# Altium PCB bootleg-alps.PcbDoc (part 1 of 3)
Units mm, origin at the board's own origin, x right, y up, seen from the top; angles counter-clockwise.
Board outline 284.8 x 94.3 mm, 2 copper layers (Component Side, Bottom Layer), stack 1.571 mm thick; 188 components, 146 nets, 677 pads, 266 vias.
Unrouted connection lines stored in the file: 68.
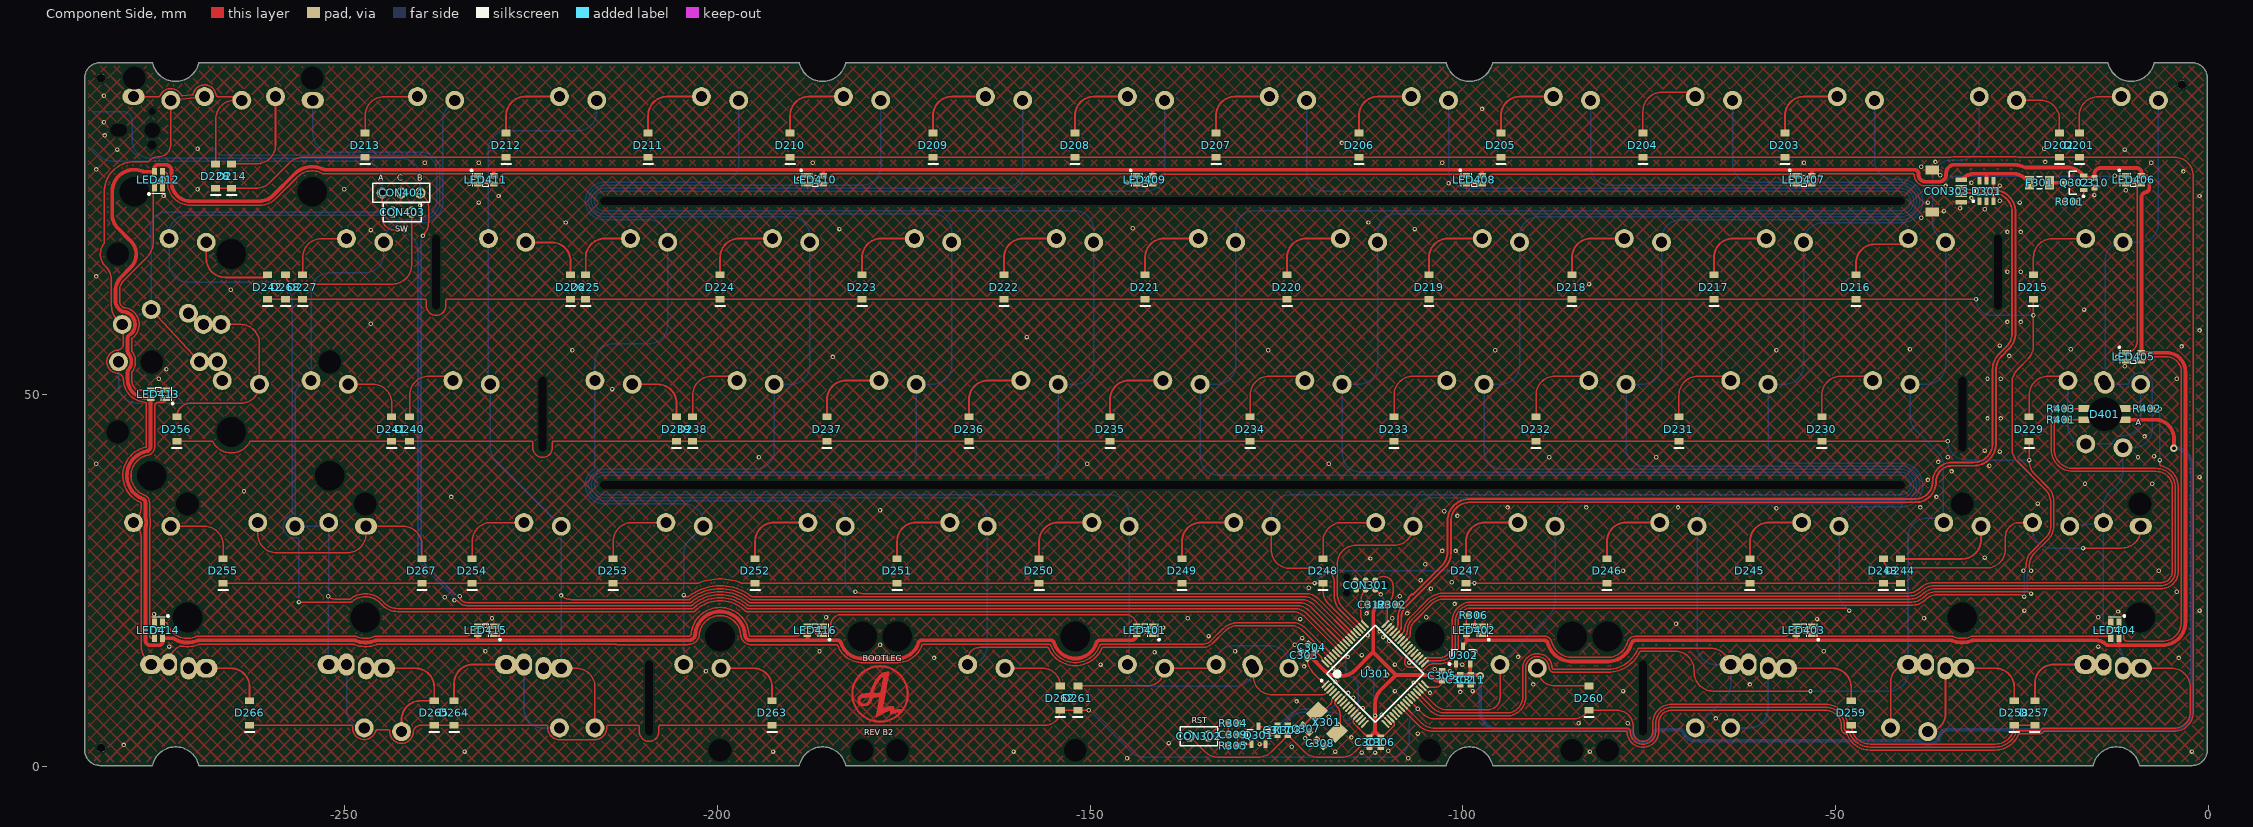
[diagram p0: Component Side view]
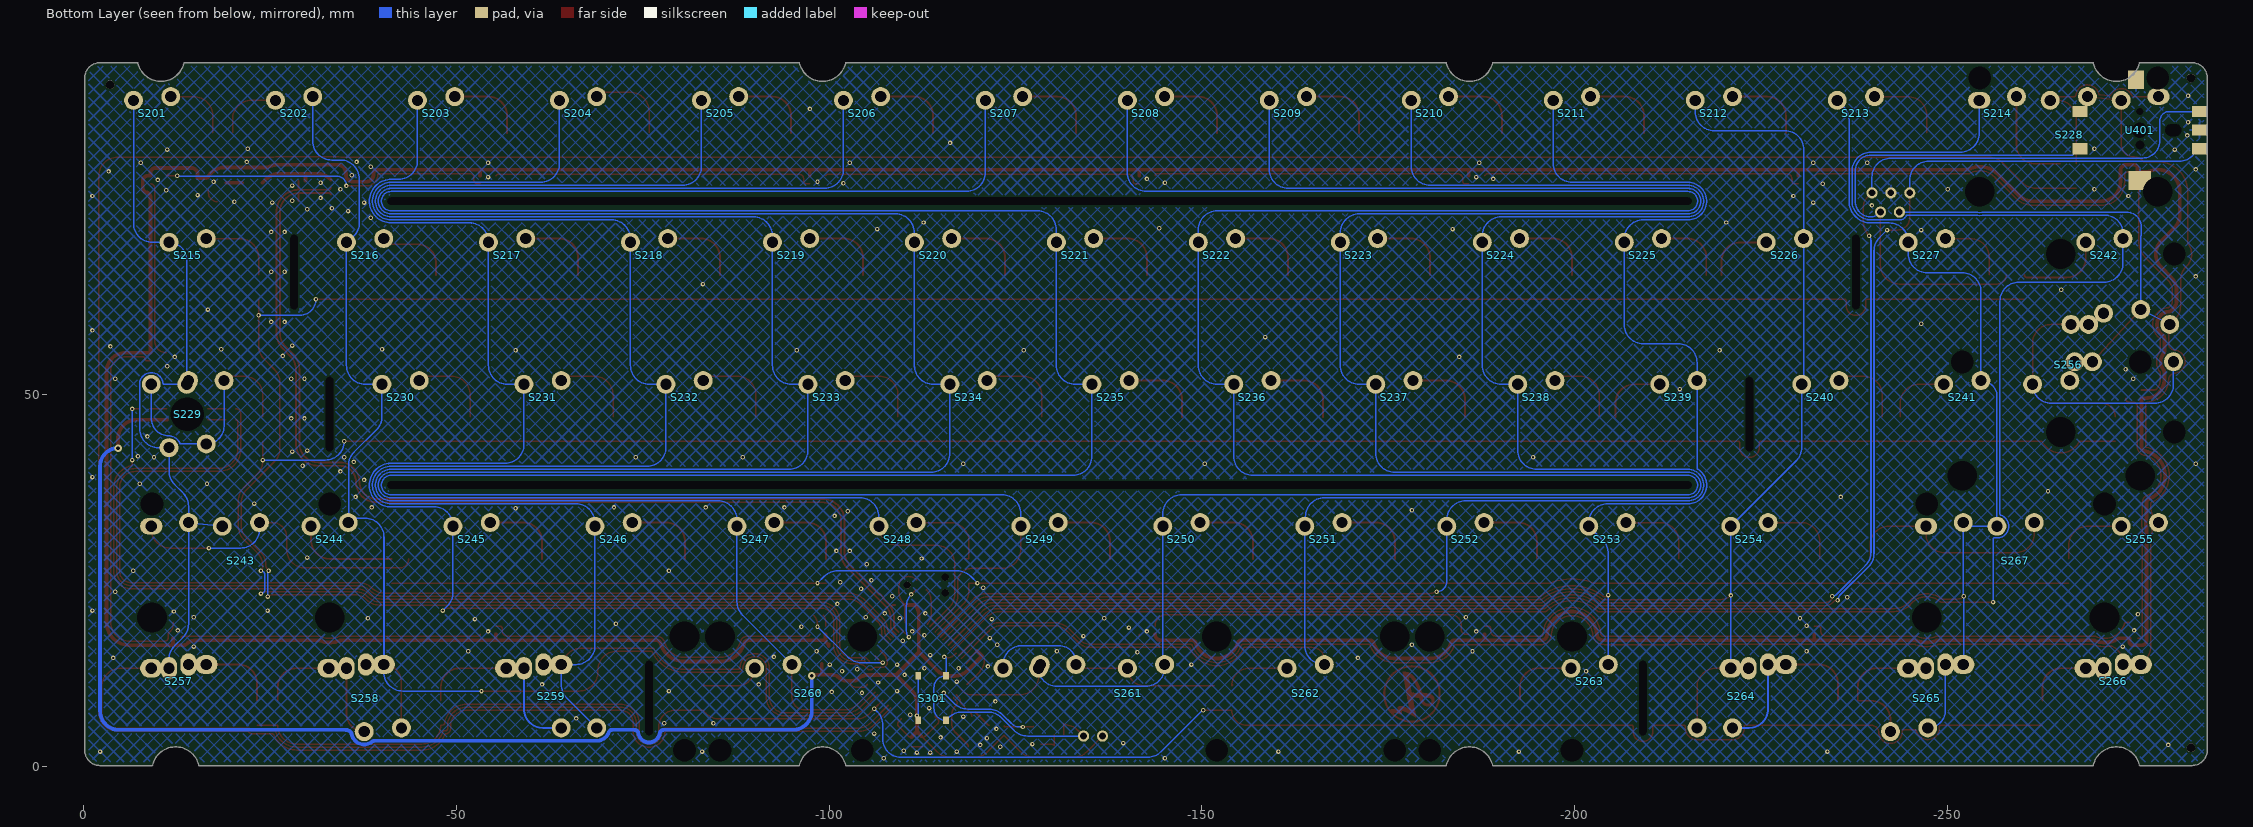
[diagram p1: Bottom Layer view, seen from below]
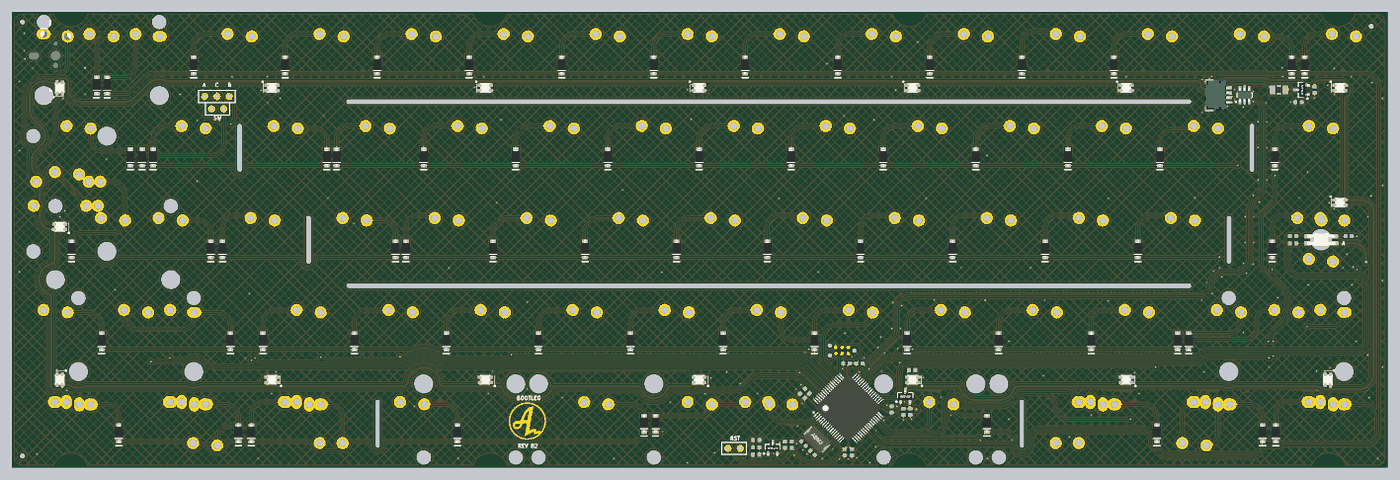
[diagram p4: 3D render of the assembled board from above, using the file's embedded part models]

## Layer stack, top to bottom
Top Solder: solder mask 0.0102, Solder Resist, Dk 3.5
Component Side: signal copper 0.0356
Dielectric 1: core 1.5, FR-4, Dk 4.2
Bottom Layer: signal copper 0.0356
Solder Side: solder mask 0.0102, Solder Resist, Dk 3.5

## Board outline
-282.85,0.165 -275.85,0.165 ccw(c-275.85,0.215) -275.801,0.204 cw(c-272.7,-0.52) -269.599,0.204 ccw(c-269.55,0.215) -269.55,0.165 -189.05,0.165 ccw(c-189.05,0.215) -189.001,0.204 cw(c-185.9,-0.52) -182.799,0.204 cw(c-185.9,-0.52) -182.799,0.204 ccw(c-182.75,0.215) -182.75,0.165 -102.25,0.165 ccw(c-102.25,0.215) -102.201,0.204 cw(c-99.1,-0.52) -95.999,0.204 ccw(c-95.95,0.215) -95.95,0.165 -15.45,0.165 ccw(c-15.45,0.215) -15.401,0.204 cw(c-12.3,-0.52) -9.199,0.204 ccw(c-9.15,0.215) -9.15,0.165 ccw(c-9.15,0.215) -9.15,0.165 -2.15,0.165 ccw(c-2.15,2.215) -0.1,2.215 -0.1,39.064 ccw(c-0.15,39.065) -0.1,39.065 -0.1,92.415 ccw(c-2.15,92.415) -2.15,94.465 -7.15,94.465 ccw(c-7.15,94.415) -7.164,94.464 ccw(c-7.177,94.415) -7.226,94.426 cw(c-10.327,95.149) -13.428,94.426 ccw(c-13.477,94.415) -13.477,94.465 -95.95,94.465 cw(c-95.95,94.415) -95.95,94.465 ccw(c-95.95,94.415) -95.999,94.426 cw(c-99.1,95.149) -102.201,94.426 ccw(c-102.25,94.415) -102.25,94.465 -182.75,94.465 ccw(c-182.75,94.415) -182.799,94.426 ccw(c-185.9,95.149) -182.799,94.426 cw(c-185.9,95.149) -189.001,94.426 ccw(c-189.05,94.415) -189.05,94.465 -269.55,94.465 ccw(c-269.55,94.415) -269.599,94.426 cw(c-272.7,95.149) -275.801,94.426 ccw(c-275.85,94.415) -275.85,94.465 -282.85,94.465 cw(c-282.85,94.415) -282.85,94.465 ccw(c-282.85,92.415) -284.9,92.415 ccw(c-284.85,92.415) -284.9,92.414 -284.9,39.065 -284.9,40.767 cw(c-284.85,40.767) -284.9,40.768 -284.9,40.767 -284.9,2.215 ccw(c-282.85,2.215)

## Design rules (kind name [scope] priority, off if disabled: settings)
Clearance [All] p1: gap=0.2 ignorepadtopadclearanceinfootprint=FALSE except(0: Arc-Hole Track-Hole SMDPad-Hole THPad-Hole Via-Hole Fill-Hole Poly-Hole Region-Hole Text-Hole; 0.254: THPad-THPad THPad-Via THPad-Fill THPad-Poly THPad-Region THPad-Text Via-Via Via-Fill Via-Poly Via-Region Via-Text Fill-Fill Fill-Poly Fill-Region Fill-Text Poly-Poly Poly-Region Poly-Text Region-Region Region-Text Text-Text)
ComponentClearance [InComponent('No Component') And OnLayer('Component Side')] p1: gap=0.254 collisioncheckmode=3 verticalgap=0.254 showdistances=FALSE
DiffPairsRouting DiffPairsRouting_USB [InDifferentialPairClass('All Differential Pairs')] p1: maxlimit=0.254 minlimit=0.203 mostfreqgap=0.203 toplayer_minwidth=0.152 toplayer_maxwidth=0.381 toplayer_prefwidth=0.152 bottomlayer_minwidth=0.152 bottomlayer_maxwidth=0.381 bottomlayer_prefwidth=0.152 maxuncoupledlength=12.7
DiffPairsRouting [All] p2: maxlimit=0.254 minlimit=0.254 mostfreqgap=0.254 toplayer_minwidth=0.381 toplayer_maxwidth=0.381 toplayer_prefwidth=0.381 bottomlayer_minwidth=0.381 bottomlayer_maxwidth=0.381 bottomlayer_prefwidth=0.381 maxuncoupledlength=12.7
HoleSize [All] p1: absolutevalues=TRUE maxlimit=20 minlimit=0.025 maxpercent=80.000 minpercent=20.000
MatchedLengths MatchedLengths_USB_DiffPairs_1 [All] p1: tolerance=0.127 checknetsindiffpair=TRUE checkdiffpairvsdiffpair=FALSE checkxsignals=FALSE checkothers=FALSE
MatchedLengths MatchedLengths_USB_DiffPairs [All] p2: tolerance=0.127 checknetsindiffpair=TRUE checkdiffpairvsdiffpair=FALSE checkxsignals=FALSE checkothers=FALSE
PolygonConnect PolygonConnect_1 [All vs IsVia] p1: connectstyle=Direct reliefconductorwidth=0.254 reliefentries=4 polygonreliefangle="90 Angle" airgapwidth=0.254
PolygonConnect [All] p2: connectstyle=Relief reliefconductorwidth=0.254 reliefentries=4 polygonreliefangle="90 Angle" airgapwidth=0.254
RoutingVias [All] p1: holewidth=0.711 width=1.27 viastyle="Through Hole" minholewidth=0.3 minwidth=0.6 maxholewidth=0.711 maxwidth=1.27
SolderMaskExpansion [All] p1: expansion=0.102 istentingtop=FALSE
Width [All] p1: maxlimit=5 minlimit=0.203 preferedwidth=0.203 minimp=50.000000 maximp=50.000000 favimp=50.000000
27 further rules are at their usual default settings.

## Classes and differential pairs
component class Designator: C201 C202 C203 C204 C205 C206 D201 D202 D203 D204 D205 D206 D207 D208 D209 D210 D211 D212 D213 D214 D215 D216 D217 D218 D219 D220 D221 D222 D223 D224 D225 D226 D227 D228 D229 D230 D231 D232 D233 D234 D235 D236 D237 D238 D239 D240 D241 D242 D243 D244 D245 D246 D247 D248 D249 D250 D251 D252 D253 D254 D255 D256 D257 D258 D259 D260 D261 D262 D263 D264 D265 D266 D267 D268 S201 S202 S203 S204 S205 S206 S207 S208 S209 S210 S211 S212 S213 S214 S215 S216 S217 S218 S219 S220 S221 S222 S223 S224 S225 S226 S227 S228 S229 S230 S231 S232 S233 S234 S235 S236 S237 S238 S239 S240 S241 S242 S243 S244 S245 S246 S247 S248 S249 S250 S251 S252 S253 S254 S255 S256 S257 S258 S259 S260 S261 S262 S263 S264 S265 S266 S267
differential pair D: +D_P -D_N

## Components (designator, comment, footprint, x,y, rotation, side; value= is the part's Value field where it differs from the comment)
C301 "" C0603[1608] -112.522,3.302 r90 top value=0.1uF
C302 "" C0603[1608] -100.33,11.684 r90 top value=0.1uF
C303 "" C0603[1608] -121.285,14.986 r315 top value=0.1uF
C304 "" C0603[1608] -120.269,16.002 r315 top value=0.1uF
C305 "" C0603[1608] -102.743,12.192 r270 top value=0.1uF
C306 "" C0603[1608] -110.998,3.302 r90 top value=0.1uF
C307 "" C0603[1608] -121.031,5.08 r135 top value=30pF
C308 "" C0603[1608] -119.126,3.175 r315 top value=30pF
C309 "" C0603[1608] -130.81,4.318 r0 top value=4.7uF
C310 "" C0603[1608] -15.24,78.359 r90 top value=4,7uF
C311 "" C0603[1608] -98.933,11.684 r90 top value=1uF
C312 "" C0603[1608] -112.141,21.717 r0 top value=4,7uF
C317 "" C0603[1608] -124.856,4.877 r270 top value=470nF
CON301 "TC2030-IDC" TC2030-IDC-NL -113.03,24.384 r180 top
CON302 "Header 2" HDR1X2 -134.127,4.115 r180 top
CON303 "Header 5" "JST SM04B-SRSS-TB" -37,77.25 r270 top locked
CON403 "Header 2" HDR1X2 -241.046,74.422 r180 top
CON404 "Header 3" HDR1X3 -239.903,77 r180 top
D201 "Diode" SOD-123 -17.272,83.415 r90 top
D202 "Diode" SOD-123 -19.939,83.415 r90 top
D203 "Diode" SOD-123 -56.769,83.415 r90 top
D204 "Diode" SOD-123 -75.819,83.415 r90 top
D205 "Diode" SOD-123 -94.869,83.415 r90 top
D206 "Diode" SOD-123 -113.919,83.415 r90 top
D207 "Diode" SOD-123 -133.096,83.415 r90 top
D208 "Diode" SOD-123 -152.019,83.415 r90 top
D209 "Diode" SOD-123 -171.069,83.415 r90 top
D210 "Diode" SOD-123 -190.246,83.415 r90 top
D211 "Diode" SOD-123 -209.296,83.415 r90 top
D212 "Diode" SOD-123 -228.346,83.415 r90 top
D213 "Diode" SOD-123 -247.269,83.415 r90 top
D214 "Diode" SOD-123 -265.176,79.25 r90 top
D215 "Diode" SOD-123 -23.431,64.365 r90 top
D216 "Diode" SOD-123 -47.244,64.365 r90 top
D217 "Diode" SOD-123 -66.294,64.365 r90 top
D218 "Diode" SOD-123 -85.344,64.365 r90 top
D219 "Diode" SOD-123 -104.521,64.365 r90 top
D220 "Diode" SOD-123 -123.571,64.365 r90 top
D221 "Diode" SOD-123 -142.621,64.365 r90 top
D222 "Diode" SOD-123 -161.544,64.365 r90 top
D223 "Diode" SOD-123 -180.594,64.365 r90 top
D224 "Diode" SOD-123 -199.644,64.365 r90 top
D225 "Diode" SOD-123 -217.678,64.365 r90 top
D226 "Diode" SOD-123 -219.71,64.365 r90 top
D227 "Diode" SOD-123 -255.651,64.365 r90 top
D228 "Diode" SOD-123 -267.335,79.25 r90 top
D229 "Diode" SOD-123 -24.003,45.315 r90 top
D230 "Diode" SOD-123 -51.816,45.315 r90 top
D231 "Diode" SOD-123 -70.993,45.315 r90 top
D232 "Diode" SOD-123 -90.17,45.315 r90 top
D233 "Diode" SOD-123 -109.22,45.315 r90 top
D234 "Diode" SOD-123 -128.524,45.315 r90 top
D235 "Diode" SOD-123 -147.32,45.315 r90 top
D236 "Diode" SOD-123 -166.243,45.315 r90 top
D237 "Diode" SOD-123 -185.293,45.315 r90 top
D238 "Diode" SOD-123 -203.327,45.315 r90 top
D239 "Diode" SOD-123 -205.486,45.315 r90 top
D240 "Diode" SOD-123 -241.3,45.315 r90 top
D241 "Diode" SOD-123 -243.713,45.315 r90 top
D242 "Diode" SOD-123 -260.35,64.365 r90 top
D243 "Diode" SOD-123 -43.561,26.265 r90 top
D244 "Diode" SOD-123 -41.275,26.265 r90 top
D245 "Diode" SOD-123 -61.468,26.265 r90 top
D246 "Diode" SOD-123 -80.645,26.265 r90 top
D247 "Diode" SOD-123 -99.568,26.265 r90 top
D248 "Diode" SOD-123 -118.745,26.265 r90 top
D249 "Diode" SOD-123 -137.668,26.265 r90 top
D250 "Diode" SOD-123 -156.845,26.265 r90 top
D251 "Diode" SOD-123 -175.895,26.265 r90 top
D252 "Diode" SOD-123 -194.945,26.265 r90 top
D253 "Diode" SOD-123 -213.995,26.265 r90 top
D254 "Diode" SOD-123 -232.918,26.265 r90 top
D255 "Diode" SOD-123 -266.319,26.265 r90 top
D256 "Diode" SOD-123 -272.542,45.315 r90 top
D257 "Diode" SOD-123 -23.241,7.215 r90 top
D258 "Diode" SOD-123 -26,7.215 r90 top
D259 "Diode" SOD-123 -47.879,7.215 r90 top
D260 "Diode" SOD-123 -83.058,9.215 r90 top
D261 "Diode" SOD-123 -151.638,9.215 r90 top
D262 "Diode" SOD-123 -154,9.215 r90 top
D263 "Diode" SOD-123 -192.659,7.215 r90 top
D264 "Diode" SOD-123 -235.331,7.215 r90 top
D265 "Diode" SOD-123 -238,7.215 r90 top
D266 "Diode" SOD-123 -262.763,7.215 r90 top
D267 "Diode" SOD-123 -239.649,26.265 r90 top
D268 "Diode" SOD-123 -257.937,64.365 r90 top
D301 "SRV05" SOT-23-6 -29.718,77.25 r90 top
D401 "QT QBLP677R-RGB" "QT QBLP677R-RGB" -13.875,47.315 r180 top
F301 "Fuse Thermal" C1206[3216] -22.606,78.359 r180 top
LED401 "WS2812B" "WS2812B - 2020" -142.65,18.315 r0 top
LED402 "WS2812B" "WS2812B - 2020" -98.433,18.315 r0 top
LED403 "WS2812B" "WS2812B - 2020" -54.217,18.315 r0 top locked
LED404 "WS2812B" "WS2812B - 2020" -12.5,18.315 r90 top
LED405 "WS2812B" "WS2812B - 2020" -10,55 r180 top
LED406 "WS2812B" "WS2812B - 2020" -10,78.75 r180 top
LED407 "WS2812B" "WS2812B - 2020" -54.217,78.75 r180 top
LED408 "WS2812B" "WS2812B - 2020" -98.433,78.75 r180 top
LED409 "WS2812B" "WS2812B - 2020" -142.65,78.75 r180 top
LED410 "WS2812B" "WS2812B - 2020" -186.867,78.75 r180 top
LED411 "WS2812B" "WS2812B - 2020" -231.083,78.75 r180 top locked
LED412 "WS2812B" "WS2812B - 2020" -274.999,78.75 r270 top
LED413 "WS2812B" "WS2812B - 2020" -274.999,50 r0 top
LED414 "WS2812B" "WS2812B - 2020" -274.999,18.315 r90 top
LED415 "WS2812B" "WS2812B - 2020" -231.083,18.315 r0 top
LED416 "WS2812B" "WS2812B - 2020" -186.867,18.315 r0 top
Q301 "2N7002 NMOS" SOT-23-3 -127.396,4.242 r90 top
Q302 "PMOS-2" SOT-23-3 -17.907,78.359 r180 top
R301 "Res1" R0603[1608] -18.542,75.819 r180 top value=10K
R302 "Res1" R0603[1608] -109.474,21.717 r0 top value=1.5K
R303 "Res1" R0603[1608] -123.459,4.877 r90 top value=10K
R304 "Res1" R0603[1608] -130.81,5.842 r0 top value=10K
R305 "Res1" R0603[1608] -130.825,2.845 r180 top value=100K
R306 "Res1" R0603[1608] -98.552,20.32 r0 top value=470
R401 "Res1" R0603[1608] -19.685,46.565 r0 top value=100R
R402 "Res1" R0603[1608] -8.186,48.065 r0 top value=100R
R403 "Res1" R0603[1608] -19.685,48.065 r180 top value=100R
S201 "MX" "Alps-switch - switched pol"#1 -9.15,85.415 r180 bottom locked
S202 "MX" Alps-switch -28.2,85.415 r180 bottom locked
S203 "MX" "Alps-switch - switched pol"#1 -47.25,85.415 r180 bottom locked
S204 "MX" "Alps-switch - switched pol"#1 -66.3,85.415 r180 bottom locked
S205 "MX" "Alps-switch - switched pol"#1 -85.35,85.415 r180 bottom locked
S206 "MX" "Alps-switch - switched pol"#1 -104.4,85.415 r180 bottom locked
S207 "MX" "Alps-switch - switched pol"#1 -123.45,85.415 r180 bottom locked
S208 "MX" "Alps-switch - switched pol"#1 -142.5,85.415 r180 bottom locked
S209 "MX" "Alps-switch - switched pol"#1 -161.55,85.415 r180 bottom locked
S210 "MX" "Alps-switch - switched pol"#1 -180.6,85.415 r180 bottom locked
S211 "MX" "Alps-switch - switched pol"#1 -199.65,85.415 r180 bottom locked
S212 "MX" "Alps-switch - switched pol"#1 -218.7,85.415 r180 bottom locked
S213 "MX" "Alps-switch - switched pol"#1 -237.75,85.415 r180 bottom locked
S214 "MX" "Alps-switch - switched pol"#2 -256.8,85.415 r180 bottom locked
S215 "MX" "ALPS-switch - 1.5U" -13.912,66.365 r180 bottom locked
S216 "MX" "Alps-switch - switched pol"#1 -37.725,66.365 r180 bottom locked
S217 "MX" "Alps-switch - switched pol"#1 -56.775,66.365 r180 bottom locked
S218 "MX" "Alps-switch - switched pol"#1 -75.825,66.365 r180 bottom locked
S219 "MX" "Alps-switch - switched pol"#1 -94.875,66.365 r180 bottom locked
S220 "MX" "Alps-switch - switched pol"#1 -113.925,66.365 r180 bottom locked
S221 "MX" "Alps-switch - switched pol"#1 -132.975,66.365 r180 bottom locked
S222 "MX" "Alps-switch - switched pol"#1 -152.025,66.365 r180 bottom locked
S223 "MX" "Alps-switch - switched pol"#1 -171.075,66.365 r180 bottom locked
S224 "MX" "Alps-switch - switched pol"#1 -190.125,66.365 r180 bottom locked
S225 "MX" "Alps-switch - switched pol"#1 -209.175,66.365 r180 bottom locked
S226 "MX" Alps-switch -228.225,66.365 r180 bottom locked
S227 "MX" "Alps-switch - switched pol"#1 -247.275,66.365 r180 bottom locked
S228 "MX" "ALPS-switch - backspace" -266.319,85.415 r180 bottom locked
S229 "MX" "ALPS-switch - CAPS" -16.294,47.315 r180 bottom locked
S230 "MX" "Alps-switch - switched pol"#1 -42.487,47.315 r180 bottom locked
S231 "MX" "Alps-switch - switched pol"#1 -61.537,47.315 r180 bottom locked
S232 "MX" "Alps-switch - switched pol"#1 -80.587,47.315 r180 bottom locked
S233 "MX" "Alps-switch - switched pol"#1 -99.637,47.315 r180 bottom locked
S234 "MX" "Alps-switch - switched pol"#1 -118.687,47.315 r180 bottom locked
S235 "MX" "Alps-switch - switched pol"#1 -137.737,47.315 r180 bottom locked
S236 "MX" "Alps-switch - switched pol"#1 -156.787,47.315 r180 bottom locked
S237 "MX" "Alps-switch - switched pol"#1 -175.837,47.315 r180 bottom locked
S238 "MX" "Alps-switch - switched pol"#1 -194.887,47.315 r180 bottom locked
S239 "MX" Alps-switch -213.937,47.315 r180 bottom locked
S240 "MX" "Alps-switch - switched pol"#1 -232.987,47.315 r180 bottom locked
S241 "MX" Alps-switch -252.031,47.315 r180 bottom locked
S242 "MX" "ALPS-switch - 1.5U" -271.087,66.365 r180 bottom locked
S243 "MX" "ALPS-switch - Left shift v2" -21.056,28.265 r180 bottom locked
S244 "MX" Alps-switch -32.96,28.265 r180 bottom locked
S245 "MX" "Alps-switch - switched pol"#1 -52.012,28.265 r180 bottom locked
S246 "MX" "Alps-switch - switched pol"#1 -71.062,28.265 r180 bottom locked
S247 "MX" "Alps-switch - switched pol"#1 -90.112,28.265 r180 bottom locked
S248 "MX" "Alps-switch - switched pol"#1 -109.162,28.265 r180 bottom locked
S249 "MX" "Alps-switch - switched pol"#1 -128.212,28.265 r180 bottom locked
S250 "MX" "Alps-switch - switched pol"#1 -147.262,28.265 r180 bottom locked
S251 "MX" "Alps-switch - switched pol"#1 -166.312,28.265 r180 bottom locked
S252 "MX" "Alps-switch - switched pol"#1 -185.362,28.265 r180 bottom locked
S253 "MX" "Alps-switch - switched pol"#1 -204.412,28.265 r180 bottom locked
S254 "MX" "Alps-switch - switched pol"#1 -223.462,28.265 r180 bottom locked
S255 "MX" Alps-switch -275.85,28.265 r180 bottom locked
S256 "MX" "ALPS-switch - Enter - rotated stab" -263.95,47.315 r180 bottom locked
S257 "MX" "ALPS-switch - 1.5u MOD-L" -13.912,9.215 r180 bottom locked
S258 "MX" "ALPS-switch - L_WIN - V3" -37.719,9.215 r180 bottom
S259 "MX" "ALPS-SWITCH - L_ALT - V3" -61.537,9.215 r180 bottom locked
S260 "MX" "ALPS-switch - L split space_V3" -102.018,9.215 r0 bottom locked
S261 "MX" "ALPS-switch - Space_V3" -142.499,9.215 r180 bottom locked
S262 "MX" "ALPS-switch - R split space_V3" -163.931,9.215 r0 bottom locked
S263 "MX" Alps-switch -202.031,9.215 r180 bottom locked
S264 "MX" "ALPS-switch - R_alt - V3" -223.462,9.215 r180 bottom
S265 "MX" "ALPS-switch - R_WIN V3" -247.269,9.215 r180 bottom
S266 "MX" "ALPS-switch - 1.5u MOD-R" -271.087,9.215 r180 bottom locked
S267 "MX" "ALPS-switch - right shift - stabs" -259.18,28.265 r180 bottom locked
S301 "SW-PB" "XKB Switch" -113.792,9.215 r90 bottom
U301 "STM32F303_LQFP64" "STM32 - LQFP64, 10x10mm" -111.76,12.446 r45 top locked
U302 "SOT23 LDO" SOT-23-3 -99.949,14.986 r90 top
U401 "EC-11" EC11-SMD -275.844,85.415 r90 bottom locked
X301 "XTAL" "CTS 445-series crystal" -118.237,5.969 r315 top value=8MHz

## Footprints (in the part's own frame and the unit in brackets; to place one, negate y for a bottom-side part, rotate by r counter-clockwise, add the part's x,y. Pads: shape width x height; smd on the part's side, far side on the other; paste and mask are expansions set on the pad)
Alps-switch [mm]
  round 2.54 hole 1.499 mask+0.102: 1(-2.5,4) 2(2.5,4.5)
  round 1 on Mech14: ""(0,0)
"ALPS-switch - 1.5U" [mm]
  round 2.54 hole 1.499 mask+0.102: 1(-2.5,4) 2(2.5,4.5)
  round 1 on Mech14: ""(0,0)
"ALPS-switch - 1.5u MOD-L" [mm]
  oval 3x2.54 hole 1.499 mask+0.102: 1(-4.881,4) 2(2.5,4.5)
  oval 2.2x3 hole 1.499 mask+0.102: 1(-2.5,4) 2(0.119,4.5)
  round 1 on Mech14: ""(-2.381,0) ""(0,0)
"ALPS-switch - 1.5u MOD-R" [mm]
  oval 3x2.54 hole 1.499 mask+0.102: 1(-2.5,4) 2(4.881,4.5)
  oval 2.2x3 hole 1.499 mask+0.102: 1(-0.119,4) 2(2.5,4.5)
  round 1 on Mech14: ""(0,0) ""(2.381,0)
"ALPS-switch - backspace" [mil]
  round 100 hole 59 mask+4: 1(98.43,177.17) 1(276.57,157.48) 2(-98.43,157.48)
  oval 118.11x86.61 hole 59 mask+4: 2(473.43,177.17)
  round 60 hole 157.01 unplated: ""(-470,-325) ""(470,-325)
  round 60 hole 120 unplated: ""(-470,275) ""(470,275)
  round 39.37 on Mech14: ""(0,0) ""(375,0)
"ALPS-switch - CAPS" [mm]
  round 2.54 hole 1.499 mask+0.102: 1(-7.263,4) 1(0.119,-4) 1(2.5,4.5) 2(-4.881,-4.5) 2(-2.5,4) 2(-2.262,4.5)
  round 1 on Mech14: ""(-4.763,0) ""(-2.381,0) ""(0,0)
"ALPS-switch - Enter - rotated stab" [mil]
  round 100 hole 59 mask+4: 1(-98.43,157.48) 1(104.28,473.62) 1(198.03,473.62) 1(276.77,532.68) 1(646.11,276.77) 2(98.43,177.17) 2(123.97,276.77) 2(217.72,276.77) 2(473.62,552.36) 2(626.43,473.62)
  round 60 hole 157.01 unplated: ""(-470,-325) ""(50.2,-94.8) ""(50.2,845.2) ""(470,-325)
  round 60 hole 120 unplated: ""(-470,275) ""(470,275) ""(650.2,-94.8) ""(650.2,845.2)
  round 39.37 on Mech14: ""(0,0) ""(281.45,375.2) ""(375.2,375.2) ""(468.95,375.2)
"ALPS-switch - L split space_V3" [mil]
  round 100 hole 59 mask+4.02: 1(473.43,-157.48) 2(276.57,-177.17)
  round 60 hole 157.01 unplated: ""(-95,-325)
  round 60 hole 120 unplated: ""(-95,275)
  round 39.37 on Mech14: ""(375,0)
"ALPS-SWITCH - L_ALT - V3" [mm]
  oval 3x2.54 hole 1.499 mask+0.102: 1(-4.881,4) 2(2.5,4.5)
  oval 2.2x3 hole 1.499 mask+0.102: 1(-2.5,4) 2(0.119,4.5)
  round 2.54 hole 1.499 mask+0.102: 1(2.5,-4) 2(7.263,-4)
  round 1 on Mech14: ""(-2.381,0.048) ""(0,0) ""(4.763,0)
"ALPS-switch - L_WIN - V3" [mm]
  oval 3x2.54 hole 1.499 mask+0.102: 1(-4.881,4) 2(2.5,4.5)
  oval 2.2x3 hole 1.499 mask+0.102: 1(-2.5,4) 2(0.119,4.5)
  round 2.54 hole 1.499 mask+0.102: 1(-0.119,-4.5) 2(4.881,-4)
  round 1 on Mech14: ""(-2.381,0) ""(0,0) ""(2.381,0)
"ALPS-switch - Left shift v2" [mil]
  oval 118.11x86.61 hole 59 mask+4.02: 1(-473.43,157.48)
  round 100 hole 59 mask+4.02: 1(98.43,177.17) 2(-276.57,177.17) 2(-98.43,157.48)
  round 60 hole 157.01 unplated: ""(-470,-325) ""(470,-325)
  round 60 hole 120 unplated: ""(-470,275) ""(470,275)
  round 39.37 on Mech14: ""(-375,0) ""(0,0)
"ALPS-switch - R split space_V3" [mil]
  round 100 hole 59 mask+4.02: 1(98.43,-157.48) 2(-98.43,-177.17)
  round 60 hole 157.01 unplated: ""(-470,-325) ""(470,-325)
  round 60 hole 120 unplated: ""(-470,275) ""(470,275)
  round 39.37 on Mech14: ""(0,0)
"ALPS-switch - R_alt - V3" [mm]
  round 2.54 hole 1.499 mask+0.102: 1(-7.025,-4) 2(-2.262,-4)
  oval 3x2.54 hole 1.499 mask+0.102: 1(-2.5,4) 2(4.881,4.5)
  oval 2.2x3 hole 1.499 mask+0.102: 1(-0.119,4) 2(2.5,4.5)
  round 1 on Mech14: ""(-4.763,0) ""(0,0) ""(2.381,0)
"ALPS-switch - R_WIN V3" [mm]
  round 2.54 hole 1.499 mask+0.102: 1(-4.881,-4.5) 2(0.119,-4)
  oval 3x2.54 hole 1.499 mask+0.102: 1(-2.5,4) 2(4.881,4.5)
  oval 2.2x3 hole 1.499 mask+0.102: 1(-0.119,4) 2(2.5,4.5)
  round 1 on Mech14: ""(-2.381,0) ""(0,0) ""(2.381,0)
"ALPS-switch - right shift - stabs" [mil]
  round 100 hole 59 mask+4: 1(-276.57,177.17) 1(-98.43,157.48) 2(98.43,177.17)
  oval 118.11x86.61 hole 59 mask+4: 2(-473.43,157.48)
  round 60 hole 157.01 unplated: ""(-470,-325) ""(470,-325)
  round 60 hole 120 unplated: ""(-470,275) ""(470,275)
  round 39.37 on Mech14: ""(-375,0) ""(0,0)
"ALPS-switch - Space_V3" [mil]
  round 100 hole 59 mask+4: 1(-754.97,157.48) 1(-370.32,177.17) 1(-98.43,157.48) 2(-567.18,157.48) 2(-558.12,177.17) 2(98.43,177.17)
  round 60 hole 120 unplated: ""(-2437.4,-275) ""(-2250,-275) ""(1499.61,-275) ""(2250,-275)
  round 60 hole 157.01 unplated: ""(-2437.4,325) ""(-2250,325) ""(1499.61,325) ""(2250,325)
  round 39.37 on Mech14: ""(-656.55,0) ""(-468.75,0) ""(0,0)
"Alps-switch - switched pol"#1 [mm]
  round 2.54 hole 1.499 mask+0.102: 1(2.5,4.5) 2(-2.5,4)
  round 1 on Mech14: ""(0,0)
"Alps-switch - switched pol"#2 [mm]
  round 2.54 hole 1.499 mask+0.102: 1(2.5,4.5)
  oval 3x2.2 hole 1.499 mask+0.102: 2(-2.5,4)
  round 1 on Mech14: ""(0,0)
C0603[1608] [mm] "Chip Resistor, 2-Leads, Body 1,57x0,80mm, IPC Medium Density"
  rect 0.8x0.85 smd: 1(-0.65,0) 2(0.65,0)
  body extent -0.83,-0.43 0.82,0.43, height 0.5
C1206[3216] [mm]
  rect 1.2x1.8 smd: 1(-1.35,0) 2(1.35,0)
  silkscreen extent -0.35,-0.8 0.35,0.8, body extent -1.6,-0.9 1.6,0.9, height 1.2
"CTS 445-series crystal" [mm]
  rect 1.8x2.4 smd: 1(-1.9,0) 2(1.9,0)
  body extent -2.5,-1.6 2.5,1.6, height 1.3
EC11-SMD [mm]
  rect 1.5x2 smd: 1(-2.5,8) 2(2.5,8) A(-2.5,-8) B(2.5,-8) C(0,-8)
  rect 2.5x3 smd: M(-6.75,0)
  rect 2.5x2.2 smd: M(6.75,0.508)
  round 0 hole 1.2 unplated: ""(-2,0)
  round 0 hole 1.6 slot 2.2 at 90 deg unplated: ""(0,-4.5)
  round 0 hole 2.1 unplated: ""(0,0)
  round 0 hole 1 unplated: ""(2.5,0)
  body extent -7.5,-8.5 7.5,8.5, height 19.5
HDR1X2 [mm] "Connector; Header; 2 Position"
  round 1.5 hole 0.9 mask+0.102: 1(0,0) 2(2.54,0)
  silkscreen extent -1.27,-1.27 3.81,1.27
HDR1X3 [mm] "Connector; Header; 3 Position"
  round 1.5 hole 0.9 mask+0.102: 1(0,0) 2(2.54,0) 3(5.08,0)
  silkscreen extent -1.27,-1.27 6.35,1.27
"JST SM04B-SRSS-TB" [mm]
  rect 0.6x1.55 smd: 1(-1.5,3.875) 2(-0.5,3.875) 3(0.5,3.875) 4(1.5,3.875)
  rect 1.2x1.8 smd: 5(-2.8,0) 5(2.8,0)
  body extent -3.01,-0.76 2.99,4.19, height 3.25
"QT QBLP677R-RGB" [mm]
  rect 1.5x0.9 smd: 1(-2.75,-0.75) 2(2.75,-0.75) 3(2.75,0.75) 4(-2.75,0.75)
  round 1 hole 4.5 unplated: ""(0,0)
  body extent -2.94,-1.4 2.94,1.4, height 0.94
R0603[1608] [mm] "Chip Resistor, 2-Leads, Body 1,57x0,80mm, IPC Medium Density"
  rect 0.8x0.85 smd: 1(-0.65,0) 2(0.65,0)
  body extent -0.83,-0.43 0.82,0.43, height 0.5
SOD-123 [mm]
  rect 0.91x1.22 smd: 1(1.635,0) 2(-1.635,0)
  silkscreen extent -2.54,-0.64 -2.54,0.63, body extent -1.87,-0.85 1.88,0.85, height 1.2
SOT-23-3 [mm] "3.3v regulator, used in Windsond S2 proto 1"
  rect 1x0.55 smd: 1(-1.2,0.95) 2(-1.2,-0.95) 3(1.2,0)
  silkscreen extent -1.32,-1.55 0.7,1.95, body extent -1.45,-1.5 1.1,1.5, height 1
SOT-23-6 [mm]
  rect 1x0.55 smd: 1(-1.375,0.95) 2(-1.375,0) 3(-1.375,-0.95) 4(1.375,-0.95) 5(1.375,0) 6(1.375,0.95)
  silkscreen extent -1.5,-1.55 0.46,1.92, body extent -1.37,-1.44 1.47,1.49, height 1.05
"STM32 - LQFP64, 10x10mm" [mm] "TSQFP, 64-Leads, Body 10.00x10.00mm, Pitch 0.50mm, IPC Medium Density"
  oval 1.4x0.3 smd: 1(-5.7,3.75) 2(-5.7,3.25) 3(-5.7,2.75) 4(-5.7,2.25) 5(-5.7,1.75) 6(-5.7,1.25) 7(-5.7,0.75) 8(-5.7,0.25) 9(-5.7,-0.25) 10(-5.7,-0.75) 11(-5.7,-1.25) 12(-5.7,-1.75) 13(-5.7,-2.25) 14(-5.7,-2.75) 15(-5.7,-3.25) 16(-5.7,-3.75) 33(5.7,-3.75) 34(5.7,-3.25) 35(5.7,-2.75) 36(5.7,-2.25) 37(5.7,-1.75) 38(5.7,-1.25) 39(5.7,-0.75) 40(5.7,-0.25) 41(5.7,0.25) 42(5.7,0.75) 43(5.7,1.25) 44(5.7,1.75) 45(5.7,2.25) 46(5.7,2.75) 47(5.7,3.25) 48(5.7,3.75)
  oval 0.3x1.4 smd: 17(-3.75,-5.7) 18(-3.25,-5.7) 19(-2.75,-5.7) 20(-2.25,-5.7) 21(-1.75,-5.7) 22(-1.25,-5.7) 23(-0.75,-5.7) 24(-0.25,-5.7) 25(0.25,-5.7) 26(0.75,-5.7) 27(1.25,-5.7) 28(1.75,-5.7) 29(2.25,-5.7) 30(2.75,-5.7) 31(3.25,-5.7) 32(3.75,-5.7) 49(3.75,5.7) 50(3.25,5.7) 51(2.75,5.7) 52(2.25,5.7) 53(1.75,5.7) 54(1.25,5.7) 55(0.75,5.7) 56(0.25,5.7) 57(-0.25,5.7) 58(-0.75,5.7) 59(-1.25,5.7) 60(-1.75,5.7) 61(-2.25,5.7) 62(-2.75,5.7) 63(-3.25,5.7) 64(-3.75,5.7)
  silkscreen extent -5.82,-4.6 4.6,4.6, body extent -6,-6 6,6, height 1.5
TC2030-IDC-NL [mm] "Tag-Connect 6-Pin with No Legs (PN# TC2030-IDC-NL)"
  round 0.9 hole 0.995 unplated: 0(-2.54,0) 0(2.54,-1.016) 0(2.54,1.016)
  round 0.79 smd paste-0.39: 1(-1.27,-0.635) 2(-1.27,0.635) 3(0,-0.635) 4(0,0.635) 5(1.35,-0.635) 6(1.27,0.635)
"WS2812B - 2020" [mm]
  rect 1x0.7 smd: 1(-1.065,-0.55) 2(1.065,-0.55) 3(1.065,0.55) 4(-1.065,0.55)
  silkscreen extent -0.38,-1.39 2.03,0.89, body extent -1.1,-1 1.1,1, height 0.86
"XKB Switch" [mm] "XKB Enterprise TS-1187A-C-D-B"
  rect 1x0.75 smd: 1(-3,1.875) 1(3,1.875) 2(-3,-1.875) 2(3,-1.875)
  body extent -3.25,-2.55 3.25,2.55, height 2

## Part data
C301 C302 C303 C304 C305 C306 C317: library part Cap, "Capacitor", LCSC MFG=YAGEO, LCSC Part #=C14663, MFG=KEMET, MFGPN=C0603C104M5RACTU, MRF.Part=CC0603KRX7R9BB104, Version="0603 imperial"
C307 C308: library part Cap, "Capacitor", LCSC MFG="Samsung Electro-Mechanics", LCSC Part #=C22397, MRF.Part=CL10C300JB8NNNC, Version="0603 imperial"
C309 C310 C312: library part Cap, "Capacitor", LCSC MFG="Samsung Electro-Mechanics", LCSC Part #=C19666
  C309: Version="0603 imperial"
C311: library part Cap, "Capacitor", LCSC MFG="Samsung Electro-Mechanics", LCSC Part #=C15849, MFG=KEMET, MFGPN=C0603C104M5RACTU, MRF.Part=CL10A105KB8NNNC, Version="0603 imperial"
CON301: library part "Header 3X2", "Header, 3-Pin, Dual row"
CON302 CON403: "Header, 2-Pin"
CON303: "JST for USB daughter board", LCSC MFG="JST Sales America", LCSC Part #=C160404, MFG="JST Sales America Inc.", MFGPN=SM04B-SRSS-TB(LF)(SN), MRF.Part=SM04B-SRSS-TB(LF)(SN)
CON404: "Header, 3-Pin"
D201 D202 D203 D204 D205 D206 D207 D208 D209 D210 D211 D212 D213 D214 D215 D216 D217 D218 D219 D220 D221 D222 D223 D224 D225 D226 D227 D228 D229 D230 D231 D232 D233 D234 D235 D236 D237 D238 D239 D240 D241 D242 D243 D244 D245 D246 D247 D248 D249 D250 D251 D252 D253 D254 D255 D256 D257 D258 D259 D260 D261 D262 D263 D264 D265 D266 D267 D268: "Default Diode", LCSC MFG=ST(Semtech), LCSC Part #=C81598, MRF.Part=1N4148W, Version=SOD-123
D301: LCSC MFG="ProTek Devices", LCSC Part #=C85364, MRF.Part=SRV05-4-P-T7
D401: "RGB LED", MFG="QT Brightek (QTB)", MFGPN=QBLP677R-RGB, Version="Common Anode RGB LED"
F301: "Thermal Fuse", LCSC MFG="Shenzhen JDT Fuse", LCSC Part #=C135338, MFG="Bel Fuse Inc.", MFGPN=0ZCJ0050FF2G, MRF.Part=ASMD1206-050
LED401 LED402 LED403 LED404 LED405 LED406 LED407 LED408 LED409 LED410 LED411 LED412 LED413 LED414 LED415 LED416: LCSC MFG=Worldsemi, LCSC Part #=C965555, MRF.Part=WS2812B-2020
Q301: library part MOSFET-N, "N-Channel MOSFET", LCSC MFG="Changjiang Electronics Tech (CJ)", LCSC Part #=C8545, MRF.Part=2N7002
Q302: "P-Channel Power MOSFET", LCSC MFG="Vishay Intertech", LCSC Part #=C10487, MRF.Part=SI2301CDS-T1-GE3, Version=SOT23-3
R301 R303 R304: "Resistor", LCSC MFG="Uniroyal Elec", LCSC Part #=C25804, MFG="Panasonic Electronic Components", MFGPN=ERJ-3EKF5101V, MRF.Part=0603WAF1002T5E, Version="0603 imperial"
R302: "Resistor", LCSC MFG="Uniroyal Elec", LCSC Part #=C22843, MRF.Part=0603WAF1501T5E, Version="0603 imperial"
R305: "Resistor", LCSC MFG="Uniroyal Elec", LCSC Part #=C25803, MRF.Part=0603WAF1003T5E, Version="0603 imperial"
R306: "Resistor", LCSC MFG="UNI-ROYAL(Uniroyal Elec)", LCSC Part #=C23179, MFG="Panasonic Electronic Components", MFGPN=ERJ-3EKF5101V, MRF.Part=0603WAF4700T5E, Version="0603 imperial"
R401 R402 R403: "Resistor", LCSC MFG="UNI-ROYAL(Uniroyal Elec)", LCSC Part #=C22775, MRF.Part=0603WAF1000T5E, Version="0603 imperial"
S201 S202 S203 S204 S205 S206 S207 S208 S209 S210 S211 S212 S213 S214 S216 S217 S218 S219 S220 S221 S222 S223 S224 S225 S226 S227 S228 S229 S230 S231 S232 S233 S234 S235 S236 S237 S238 S239 S240 S241 S242 S243 S244 S245 S246 S247 S248 S249 S250 S251 S252 S253 S254 S255 S256 S257 S258 S259 S260 S261 S262 S263 S264 S265 S266 S267: library part SW-PB, "Switch"
S215: library part SW-PB, "TAB"
S301: "Switch", LCSC MFG="XKB Enterprise", LCSC Part #=C318888, MFG=C&K, MFGPN="PTS645SM43SMTR92 LFS", MRF.Part=TS-1187A-C-D-B
U301: LCSC MFG=STMicroelectronics, LCSC Part #=C183214, MRF.Part=STM32F303RET6, Version=LQFP-64
U302: LCSC MFG="Torex Semicon", LCSC Part #=C5446, MFG="Texas Instruments", MFGPN=TPS7A0533PDBZ, MRF.Part=XC6206P332MR
X301: "Crystal Oscillator", LCSC MFG="Yangxing Tech", LCSC Part #=C115962, MRF.Part=X50328MSB2GI, Version=SMD-5032_2P

## Free pads (board coordinates)
  round 1.152 hole 1.152 unplated paste+0.148 mask+0.148: ""(-282.707,92.4) ""(-282.707,2.54) ""(-3.498,91.511)
  round 0 hole 1 slot 10 at 90 deg unplated: ""(-237.75,66.365) ""(-223.462,47.315) ""(-209.169,9.215) ""(-75.824,9.215) ""(-32.962,47.315) ""(-28.2,66.365)
  round 0 hole 1 slot 175 at 0 deg unplated: ""(-128.212,37.79) ""(-128.212,75.89)

## Via types
v1: diameter 0.6, hole 0.3, Component Side to Bottom Layer, tented both sides, 264 vias
v2: diameter 1, hole 0.5, Component Side to Bottom Layer, tented both sides, 2 vias

## Nets (pads, with @x,y where several pads share a name; then routed paths per layer and width w, separated by ;. In a path a pad name is that pad's centre, name@x,y a point inside that pad or via, vN(x,y) a via of type N, cw(c..) or ccw(c..) an arc to the next point about the centre after c; other vN are vias at no path point)
BOOT0: C309.1 CON302.1 R304.1 S301.2 U301.60 | length 38.3
  Component Side w0.203: CON302.1@-134.127,4.115 -133.347,4.895 cw(c-131.551,3.099) -131.551,5.639 R304.1@-131.475,5.639 ; C309.1@-131.46,4.318 R304.1@-131.46,5.842 ; U301.60@-117.028,15.239 U301.60@-116.887,15.098 ; v1(-115.443,14.732) -115.57,14.732 v1@-115.697,14.605 ; U301.60@-116.553,14.839 cw(c-116.657,14.664) U301.60@-116.541,14.832 ; U301.60@-116.553,14.839 cw(c-115.697,16.287) -116.886,15.097 ccw(c-115.697,16.287) U301.60@-116.553,14.839 ; U301.60@-116.553,14.839 cw(c-116.657,14.664) U301.60@-116.541,14.832 ; U301.60@-116.541,14.832 ccw(c-116.285,15.204) -116.458,14.786 ; U301.60@-116.541,14.832 ccw(c-116.285,15.204) -116.458,14.786 ; -116.458,14.786 cw(c-116.536,14.599) -116.446,14.781 ; -116.458,14.786 cw(c-116.536,14.599) -116.446,14.781 ; -116.446,14.781 ccw(c-115.697,16.287) v1@-115.697,14.605 ; -116.446,14.781 ccw(c-115.697,16.287) v1@-115.697,14.605
  Bottom Layer w0.203: CON302.1@-134.127,4.115 -126.604,4.115 ccw(c-126.604,6.655) -124.808,4.859 -123.071,6.596 cw(c-121.275,4.8) -121.275,7.34 -117.844,7.34 cw(c-117.844,4.8) -116.048,6.596 S301.2@-115.667,6.215 ccw(c-115.667,7.836) -114.046,7.836 -114.046,10.594 ccw(c-115.667,10.594) S301.2@-115.667,12.215 -115.667,14.508 cw(c-115.443,14.508) v1(-115.443,14.732)
col1: S201.2 S215.1 S229.2 S243.2 S257.1 U301.24 | length 224
  Component Side w0.203: U301.24@-107.906,8.239 -105.588,5.921 ccw(c-103.792,7.717) -103.792,5.177 -77.995,5.177 cw(c-77.995,4.715) -77.534,4.715 ccw(c-75.824,4.715) -75.824,3.005 ccw(c-75.824,4.715) -74.118,4.61 ccw(c-75.824,4.715) -74.114,4.715 -74.114,5.842 cw(c-71.978,5.842) -73.502,7.34 cw(c-71.978,5.842) -71.978,7.979 -51.317,7.979 cw(c-51.317,5.439) -48.791,5.704 -48.791,5.125 ccw(c-48.489,5.125) -48.489,4.823 -48.336,4.823 cw(c-48.335,4.62) -48.142,4.682 ccw(c-45.347,5.58) -48.054,4.445 ccw(c-45.347,5.58) -46.357,2.824 ccw(c-45.347,5.58) -45.347,2.645 -28.532,2.645 ccw(c-28.532,5.58) -25.737,4.682 ccw(c-28.532,5.58) -25.737,4.684 ccw(c-28.532,5.58) -25.735,4.689 cw(c-25.542,4.628) -25.735,4.691 cw(c-25.542,4.628) -25.596,4.823 -23.851,4.823 -22.631,4.823 ccw(c-22.631,5.125) -22.343,5.035 ; -22.343,5.036 cw(c-22.149,4.974) -22.148,5.177 -4.516,5.177 ccw(c-4.516,7.314) -2.954,5.856 ccw(c-4.516,7.314) -2.379,7.314 -2.379,10.675 ccw(c-4.919,10.675) -4.919,13.215 S257.1@-9.031,13.215
  Bottom Layer w0.203: S243.2@-18.556,32.265 S243.2@-14.031,32.765 ; S229.2@-13.794,51.315 -10.794,51.315 ccw(c-10.794,51.518) -10.593,51.495 cw(c-9.031,51.315) -10.173,52.395 cw(c-9.031,51.315) -7.89,52.395 cw(c-9.031,51.315) -7.47,51.495 cw(c-9.031,51.315) -7.47,51.494 cw(c-9.031,51.315) -7.469,51.146 ccw(c-7.267,51.124) -7.47,51.124 -7.47,45.355 cw(c-10.01,45.355) -10.01,42.815 S229.2@-11.412,42.815 -11.412,39.678 cw(c-13.952,39.678) -11.508,38.989 cw(c-13.952,39.678) -12.156,37.882 -13.287,36.751 ccw(c-11.491,34.955) -14.031,34.955 S243.2@-14.031,32.765 ; S229.2@-13.794,52.395 -13.794,67.984 cw(c-11.412,67.984) S215.1@-11.412,70.365 ; S257.1@-11.412,13.215 -11.412,14.424 ccw(c-13.952,14.424) -12.156,16.22 -13.287,17.351 cw(c-11.491,19.147) -14.031,19.147 S243.2@-14.031,32.765 ; -10.102,70.365 -9.19,70.365 ccw(c-9.19,72.905) -6.65,72.905 S201.2@-6.65,89.415
col2: S202.2 S216.2 S230.2 S244.2 S258.2 U301.28 | length 179.7
  Component Side w0.203: U301.28@-106.492,9.653 -104.401,7.562 ccw(c-102.605,9.358) -102.605,6.818 -94.103,6.818 ccw(c-94.103,9.358) -91.563,9.358 -91.563,13.149 ; -91.56,13.334 ccw(c-89.993,13.215) -91.563,13.149 ; -88.505,13.72 cw(c-89.993,13.215) -88.427,13.348 cw(c-89.993,13.215) -88.427,13.347 cw(c-89.993,13.215) -88.422,13.267 ccw(c-87.741,13.348) -87.741,12.663 -86.868,12.663 -85.554,12.663 cw(c-85.553,12.459) -85.545,12.662 ccw(c-85.349,17.47) -85.154,12.662 cw(c-85.146,12.459) -85.145,12.663 -80.794,12.663 cw(c-80.793,12.459) -80.785,12.662 ccw(c-80.59,17.47) -79.145,12.88 ccw(c-80.59,17.47) -76.62,14.751 ccw(c-80.59,17.47) -76.251,15.39 cw(c-76.067,15.302) -76.066,15.505 -71.501,15.505 cw(c-71.501,12.965) -68.961,12.965 -68.961,12.7 ccw(c-66.421,12.7) -66.421,10.16 v1(-53.34,10.16) ; -88.505,13.721 ccw(c-89.993,13.215) -91.563,13.149 ; S258.2@-42.6,5.215 -42.6,11.334 cw(c-40.219,11.334) S258.2@-40.219,13.715
  Bottom Layer w0.203: v1@-53.467,10.16 v1(-53.34,10.16) -42.759,10.16 ccw(c-42.759,12.7) -40.219,12.7 S258.2@-40.219,13.715 ; S258.2@-40.259,14.295 -40.259,30.805 cw(c-37.719,30.805) -37.719,33.345 -35.5,33.345 -35.5,40.417 ccw(c-38.04,40.417) -36.244,42.213 -39.244,45.213 cw(c-37.447,47.009) -39.987,47.009 S230.2@-39.987,51.315 -37.765,51.315 ccw(c-37.765,53.855) -35.225,53.855 S216.2@-35.225,70.365 ; -36.213,71.203 cw(c-34.417,72.999) -36.957,72.999 -36.957,78.867 cw(c-34.417,78.867) -34.417,81.407 -33.24,81.407 ccw(c-33.24,83.947) -30.7,83.947 S202.2@-30.7,89.915
col3: S203.2 S217.2 S231.2 S245.2 U301.38 | length 186.2
  Component Side w0.203: U301.38@-107.201,15.169 -106.905,15.465 ccw(c-107.048,15.609) U301.38@-106.846,15.593 -107.31,15.129 ccw(c-106.151,13.97) -107.79,13.97 ccw(c-107.188,13.97) -107.61,13.541 ccw(c-107.188,13.97) -107.188,13.368 -106.351,13.368 cw(c-106.351,12.607) -105.813,13.146 cw(c-105.957,13.001) -105.805,13.136 ccw(c-105.467,13.436) -105.762,13.094 ccw(c-105.467,13.436) -105.501,12.986 ccw(c-105.467,13.436) -105.148,13.116 -104.867,13.397 ; -104.866,13.398 cw(c-103.869,12.4) -103.869,13.811 -103.124,13.811 ccw(c-103.124,16.351) -101.41,14.476 ccw(c-101.547,14.626) -101.397,14.489 cw(c-101.174,14.286) -101.358,14.525 ccw(c-103.124,16.351) -100.584,16.351 -100.584,19.558 cw(c-98.85,19.558) -100.514,20.045 cw(c-98.85,19.558) -98.85,21.292 -48.945,21.292 cw(c-48.945,20.143) v1(-48.133,20.955)
  Bottom Layer w0.203: v1(-48.133,20.955) -48.768,21.59 cw(c-46.972,23.386) -49.512,23.386 S245.2@-49.512,32.265 -49.512,32.331 cw(c-46.972,32.331) -46.972,34.871 -41.212,34.871 ccw(c-41.212,37.79) -40.048,35.113 ccw(c-41.212,37.79) -38.518,36.666 ccw(c-41.212,37.79) -38.391,38.539 ccw(c-41.212,37.79) -40.857,40.688 ccw(c-41.212,37.79) -41.212,40.709 -56.497,40.709 cw(c-56.497,43.249) -59.037,43.249 S231.2@-59.037,51.315 -56.815,51.315 ccw(c-56.815,53.855) -54.275,53.855 S217.2@-54.275,70.365 -54.275,70.431 cw(c-51.735,70.431) -51.735,72.971 -41.212,72.971 ccw(c-41.212,75.89) -38.313,75.545 ccw(c-41.212,75.89) -39.076,77.88 ccw(c-41.212,75.89) -40.519,78.726 ccw(c-41.212,75.89) -41.212,78.809 -41.519,78.809 -42.21,78.809 cw(c-42.21,81.349) -44.75,81.349 S203.2@-44.75,89.415
col4: S204.2 S218.2 S232.2 S246.2 S259.2 U301.29 | length 266.5
  Component Side w0.203: U301.29@-106.138,10.006 -104.097,7.965 ccw(c-102.301,9.761) -102.301,7.221 -94.103,7.221 ccw(c-94.103,9.358) -92.201,8.384 ccw(c-94.103,9.358) -91.966,9.358 -91.966,13.136 ccw(c-92.17,13.137) -91.967,13.144 cw(c-89.993,13.215) -91.967,13.157 ; -91.893,13.753 ccw(c-89.993,13.215) -91.967,13.158 cw(c-89.993,13.215) -91.914,13.672 cw(c-89.993,13.215) -91.195,14.782 ; -91.348,14.651 cw(c-89.993,13.215) -89.255,15.047 cw(c-89.993,13.215) -88.025,13.383 cw(c-89.993,13.215) -88.021,13.317 ccw(c-87.818,13.328) -88.015,13.277 ccw(c-87.741,13.348) -87.901,13.115 ccw(c-87.741,13.348) -87.741,13.066 -87.117,13.066 -85.555,13.066 cw(c-85.553,12.459) -85.538,13.066 cw(c-85.541,12.862) -85.534,13.065 cw(c-85.541,12.862) -85.532,13.065 ccw(c-85.349,17.47) -85.163,13.066 cw(c-85.154,12.863) -85.153,13.066 -80.786,13.066 cw(c-80.785,12.863) -80.776,13.066 ccw(c-80.59,17.47) -77.843,14.022 ccw(c-80.59,17.47) -76.871,15.101 ccw(c-80.59,17.47) -76.517,15.783 cw(c-76.329,15.705) -76.328,15.909 -66.743,15.909 cw(c-66.743,13.369) -64.947,15.165 S259.2@-64.077,14.295
  Bottom Layer w0.203: S259.2@-68.799,5.215 -64.781,9.234 ccw(c-66.577,11.03) -64.037,11.03 S259.2@-64.037,13.715 -66.022,13.715 cw(c-66.022,16.255) -68.562,16.255 S246.2@-68.562,32.265 -68.562,32.734 cw(c-66.022,32.734) -66.022,35.274 -41.212,35.274 ccw(c-41.212,37.79) -38.856,36.907 ccw(c-41.212,37.79) -39.518,39.65 ccw(c-41.212,37.79) -41.212,40.306 -75.547,40.306 cw(c-75.547,42.846) -78.087,42.846 S232.2@-78.087,51.315 -75.865,51.315 ccw(c-75.865,53.855) -73.325,53.855 S218.2@-73.325,70.365 -73.325,70.834 cw(c-70.785,70.834) -70.785,73.374 -41.212,73.374 ccw(c-41.212,75.89) -41.212,78.406 -61.26,78.406 cw(c-61.26,80.946) -63.8,80.946 S204.2@-63.8,89.415
col5: S205.2 S219.2 S233.2 S247.2 S260.2 U301.30 | length 295.7
  Component Side w0.203: U301.30@-105.759,10.36 U301.30@-105.785,10.36 -103.793,8.368 ccw(c-101.997,10.164) -101.997,7.624 -96.687,7.624 ccw(c-96.687,9.318) -94.993,9.318 S260.2@-94.993,13.715 ; S260.2@-95.033,13.715 S260.2@-95.033,14.295
  Bottom Layer w0.203: S260.2@-94.993,13.715 -88.356,20.352 ccw(c-90.152,22.148) -87.612,22.148 S247.2@-87.612,32.265 -87.612,33.137 cw(c-85.072,33.137) -85.072,35.677 -41.212,35.677 ccw(c-41.212,37.79) -41.212,39.903 -94.597,39.903 cw(c-94.597,42.443) -97.137,42.443 S233.2@-97.137,51.315 -94.915,51.315 ccw(c-94.915,53.855) -92.375,53.855 S219.2@-92.375,70.365 -92.375,71.237 cw(c-89.835,71.237) -89.835,73.777 -41.212,73.777 ccw(c-41.212,75.89) -41.212,78.003 -80.31,78.003 cw(c-80.31,80.543) -82.85,80.543 S205.2@-82.85,89.415
col6: S206.2 S220.2 S234.2 S248.2 U301.50 | length 354.5
  Component Side w0.203: U301.50@-113.492,18.775 -116.096,21.378 cw(c-114.3,23.174) -116.84,23.174 -116.84,27.178 cw(c-114.3,27.178) -114.3,29.718 -109.202,29.718 ccw(c-109.202,32.258) -107.119,30.805 ccw(c-109.202,32.258) -106.662,32.258 S248.2@-106.662,32.265
  Bottom Layer w0.203: S248.2@-106.662,32.265 -106.662,33.54 cw(c-104.122,33.54) -104.122,36.08 -41.212,36.08 ccw(c-41.212,37.79) -41.212,39.5 -113.647,39.5 cw(c-113.647,42.04) -116.187,42.04 S234.2@-116.187,51.315 -113.965,51.315 ccw(c-113.965,53.855) -111.425,53.855 S220.2@-111.425,70.365 -111.425,71.64 cw(c-108.885,71.64) -108.885,74.18 -41.212,74.18 ccw(c-41.212,75.89) -41.212,77.6 -99.36,77.6 cw(c-99.36,80.14) -101.41,78.641 ccw(c-101.908,78.302) -101.428,78.665 cw(c-101.266,78.788) -101.432,78.671 cw(c-99.36,80.14) -101.9,80.14 S206.2@-101.9,89.415
col7: S207.2 S221.2 S235.2 S249.2 U301.51 | length 428.7
  Component Side w0.203: S249.2@-125.712,32.265 -125.712,29.149 ccw(c-123.172,29.149) -123.172,26.609 -119.088,26.609 cw(c-119.088,24.765) -117.243,24.765 -117.243,22.87 ccw(c-114.703,22.87) -116.499,21.074 U301.51@-113.846,18.421
  Bottom Layer w0.203: S249.2@-125.712,32.265 -125.712,33.944 cw(c-123.172,33.944) -123.172,36.484 -41.212,36.484 ccw(c-41.212,37.79) -41.212,39.096 -132.697,39.096 cw(c-132.697,41.636) -135.237,41.636 S235.2@-135.237,51.315 -133.015,51.315 ccw(c-133.015,53.855) -130.475,53.855 S221.2@-130.475,70.365 -130.475,72.044 cw(c-127.935,72.044) -127.935,74.584 -41.212,74.584 ccw(c-41.212,75.89) -41.212,77.196 -118.41,77.196 cw(c-118.41,79.736) -120.95,79.736 S207.2@-120.95,89.415
col8: S208.2 S222.2 S236.2 S250.2 S261.2 U301.3 | length 384.1
  Component Side w0.203: S261.2@-128.363,13.815 S261.2@-128.363,14.295 ; S261.2@-128.093,13.215 -128.093,12.192 ccw(c-125.553,12.192) -125.553,9.652 -123.825,9.652 -121.031,9.652 -118.872,9.652 ccw(c-118.872,10.687) -118.14,9.955 U301.3@-117.735,10.36
  Bottom Layer w0.203: S208.2@-140,89.415 -140,82.296 -140,79.736 cw(c-142.54,79.736) -142.54,77.196 -215.212,77.196 ccw(c-215.212,75.89) -215.212,74.584 -152.065,74.584 cw(c-152.065,72.044) -149.525,72.044 S222.2@-149.525,70.365 -149.525,53.855 cw(c-152.065,53.855) -152.065,51.315 S236.2@-154.287,51.315 -154.287,41.636 cw(c-156.827,41.636) -156.827,39.096 -215.212,39.096 ccw(c-215.212,37.79) -215.212,36.484 -147.302,36.484 cw(c-147.302,33.944) -144.762,33.944 S250.2@-144.762,32.265 -144.762,13.952 cw(c-144.999,13.952) S261.2@-144.999,13.715 -144.999,13.335 ccw(c-142.459,13.335) -142.459,10.795 -130.513,10.795 ccw(c-130.513,13.215) S261.2@-128.093,13.215
col9: S209.2 S223.2 S237.2 S251.2 S262.2 U301.62 | length 330.9
  Component Side w0.203: S262.2@-166.471,14.295 cw(c-164.756,14.295) -164.756,16.01 -155.749,16.01 cw(c-155.748,15.807) -155.562,15.889 ccw(c-151.993,17.47) -154.205,14.254 ccw(c-151.993,17.47) -150.357,13.926 ccw(c-151.993,17.47) -148.424,15.889 cw(c-148.238,15.807) -148.237,16.01 -134.99,16.01 ccw(c-134.99,18.15) -133.477,16.637 -131.917,18.197 cw(c-130.121,16.401) -130.121,18.941 -123.196,18.941 cw(c-123.196,16.401) -121.4,18.197 U301.62@-117.735,14.532
  Bottom Layer w0.203: S262.2@-166.431,13.715 -166.352,13.715 ccw(c-166.352,16.255) -163.812,16.255 S251.2@-163.812,32.265 ; S251.2@-163.891,32.265 -163.891,33.54 ccw(c-166.431,33.54) -166.431,36.08 -215.212,36.08 cw(c-215.212,37.79) -215.212,39.5 -175.877,39.5 ccw(c-175.877,42.04) -173.337,42.04 S237.2@-173.337,51.315 -171.115,51.315 ccw(c-171.115,53.855) -168.575,53.855 S223.2@-168.575,70.365 -168.575,71.64 ccw(c-171.115,71.64) -171.115,74.18 -215.212,74.18 cw(c-215.212,75.89) -215.212,77.6 -161.59,77.6 ccw(c-161.59,80.14) -159.05,80.14 S209.2@-159.05,89.415